# Altium PCB kijek_d.PcbDoc
Units mm, origin at the board's own origin, x right, y up, seen from the top; angles counter-clockwise.
Board outline 45 x 20 mm, 2 copper layers (Top Layer, Bottom Layer); 14 components, 17 nets, 75 pads, 2 vias.
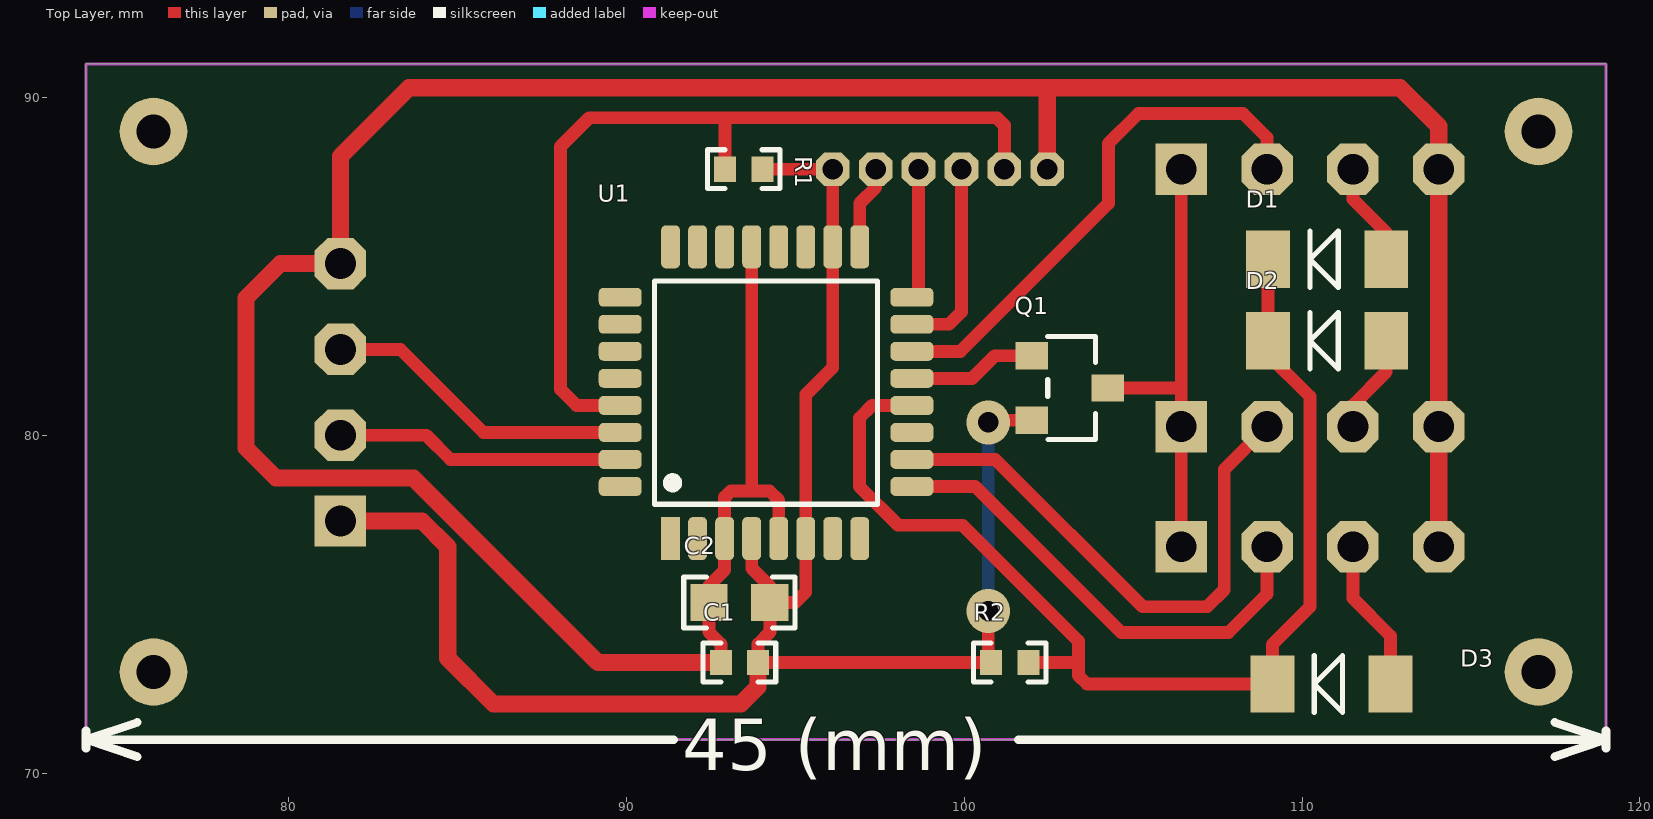
[diagram p0: Top Layer view]
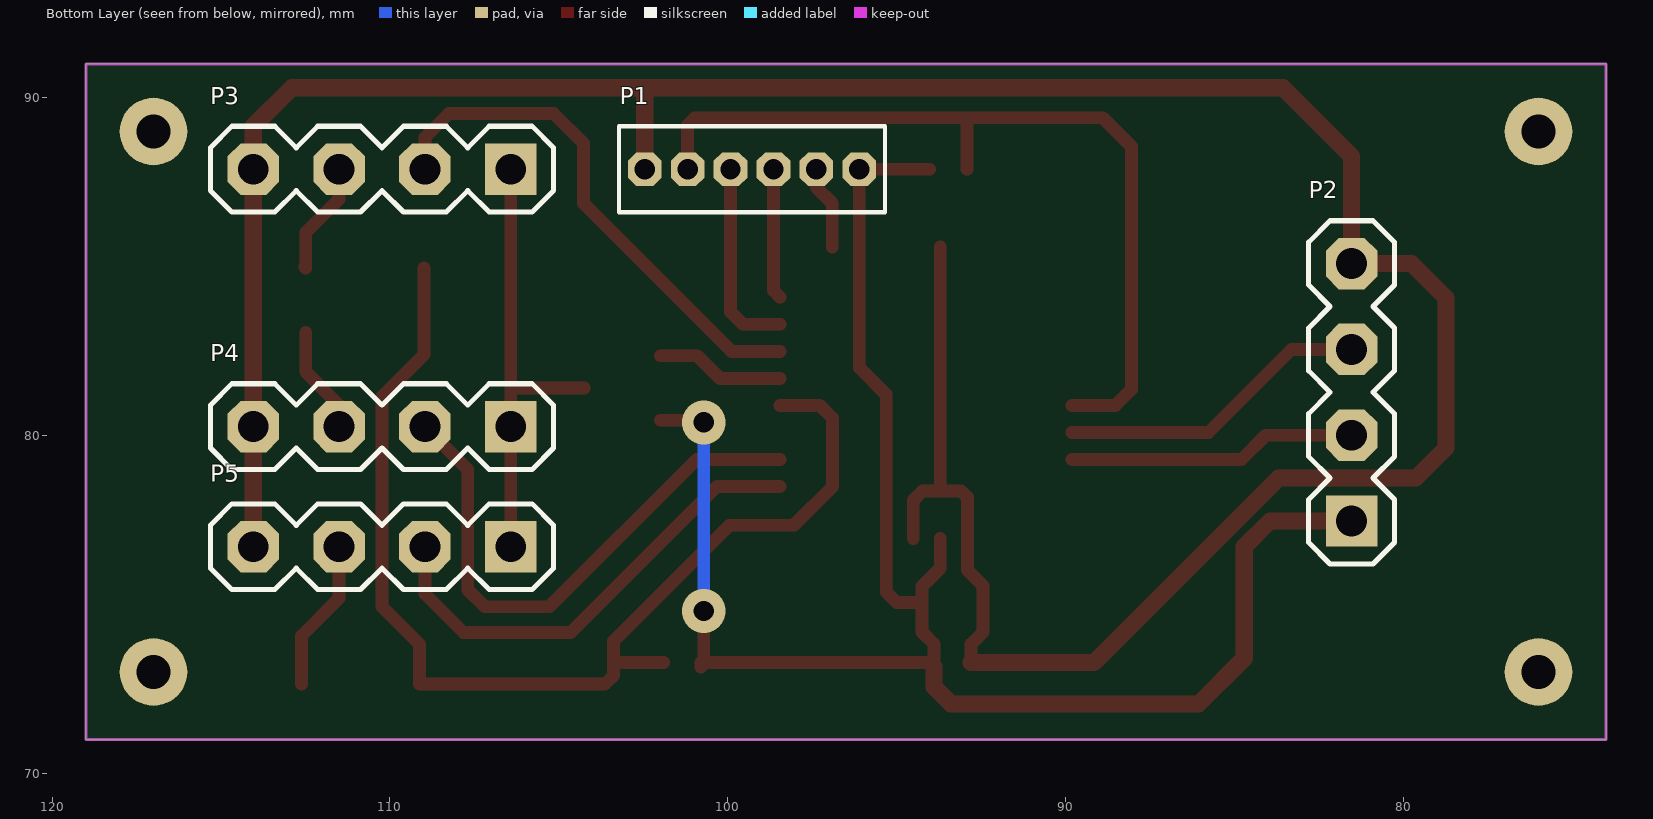
[diagram p1: Bottom Layer view, seen from below]

## Layer stack, top to bottom
Top Layer: signal copper 0.0356
Dielectric: dielectric 0.32, FR-4, Dk 4.8
Bottom Layer: signal copper 0.0356

## Board outline
74,71 119,71 119,91 74,91

## Design rules (kind name [scope] priority, off if disabled: settings)
Clearance [All] p1: gap=0.203
PlaneConnect [All] p1: planeconnectstyle=Relief reliefexpansion=0.508 reliefentries=4 reliefconductorwidth=0.381 reliefairgap=0.254
PolygonConnect [All] p1: connectstyle=Relief reliefconductorwidth=0.381 reliefentries=4 polygonreliefangle="90 Angle" airgapwidth=0.254
RoutingVias [All] p1: holewidth=0.711 width=1.27 viastyle="Through Hole" minholewidth=0.4 minwidth=1 maxholewidth=0.711 maxwidth=1.27
SolderMaskExpansion [All] p1: expansion=0.102
Width [All] p1: maxlimit=0.508 minlimit=0.254 preferedwidth=0.381
27 further rules are at their usual default settings.

## Components (designator, comment, footprint, x,y, rotation, side; value= is the part's Value field where it differs from the comment)
C1 "100nF/16V" C0402 93.345,73.279 r180 top
C2 "10uF/6,3V" C0603 93.345,75.057 r180 top
D1 "1N4148" DO-213A 110.744,85.217 r0 top
D2 "1N4148" DO-213A 110.744,82.804 r0 top
D3 "1N4148" DO-213A 110.871,72.644 r0 top
P1 "PROGRAM" SMA06-1 96.108,87.884 r180 bottom
P2 "RS232+PWR" MA04-1 81.534,81.28 r90 bottom
P3 "CZ_LEWO" MA04-1 110.236,87.884 r0 bottom
P4 "CZ_PROSTO" MA04-1 110.236,80.264 r0 bottom
P5 "CZ_PRAWO" MA04-1 110.236,76.708 r0 bottom
Q1 "AO3401" SOT23 103.124,81.407 r270 top
R1 "10K" R0402 93.472,87.884 r180 top
R2 "10K" R0402 101.346,73.279 r180 top
U1 "ATmega8-AU/MU" TQFP-32A 94.133,81.268 r90 top

## Footprints (in the part's own frame and the unit in brackets; to place one, negate y for a bottom-side part, rotate by r counter-clockwise, add the part's x,y. Pads: shape width x height; smd on the part's side, far side on the other; paste and mask are expansions set on the pad)
C0402 [mm] "Chip Resistor, Body 1.0x0.5mm, IPC Low Density"
  rect 0.65x0.75 smd: 1(-0.55,0) 2(0.55,0)
  silkscreen extent -1.07,-0.58 1.07,0.58, body extent -0.52,-0.28 0.53,0.28, height 0.4
C0603 [mm] "Chip Resistor, Body 1.6x0.8mm, IPC Low Density"
  rect 1.1x1.1 smd: 1(-0.9,0) 2(0.9,0)
  silkscreen extent -1.65,-0.75 1.65,0.75, body extent -0.85,-0.47 0.85,0.47, height 0.6
DO-213A [mm]
  rect 1.3x1.7 smd: 1(-1.75,0) 2(1.75,0)
  silkscreen extent -0.51,-0.84 0.33,0.84, body extent -1.75,-0.7 1.75,0.7, height 1.39
MA04-1 [mil]
  rect 60x60 hole 35.98: 1(-150,0)
  oct 60x60 hole 35.98: 2(-50,0) 3(50,0) 4(150,0)
  silkscreen extent -200,-50 200,50, body extent -200,-50 200,50, height 339
R0402 [mm] "Chip Resistor, Body 1.0x0.5mm, IPC Low Density"
  rect 0.65x0.75 smd: 1(-0.55,0) 2(0.55,0)
  silkscreen extent -1.07,-0.58 1.07,0.58, body extent -0.52,-0.28 0.53,0.28, height 0.4
SMA06-1 [mm]
  oct 1x1 hole 0.6: 1(-6.35,0) 2(-5.08,0) 3(-3.81,0) 4(-2.54,0) 5(-1.27,0) 6(0,0)
  silkscreen extent -7.11,-1.27 0.76,1.27, body extent -6.98,-1.2 0.64,1.2, height 5
SOT23 [mil]
  rect 32x38 smd: 1(-37.6,-44.33) 2(37.6,-44.33) 3(0,44.33)
  silkscreen extent -60,-26 60,30, body extent -57,-49 57,48, height 40
TQFP-32A [mil]
  rect 50x22 smd: 1(-170,111.22)
  rrect50% 50x22 smd: 2(-170,79.72) 3(-170,48.23) 4(-170,16.73) 5(-170,-14.76) 6(-170,-46.26) 7(-170,-77.76) 8(-170,-109.25) 17(170,-109.25) 18(170,-77.76) 19(170,-46.26) 20(170,-14.76) 21(170,16.73) 22(170,48.23) 23(170,79.72) 24(170,111.22)
  rrect50% 22x50 smd: 9(-109.25,-170) 10(-77.76,-170) 11(-46.26,-170) 12(-14.76,-170) 13(16.73,-170) 14(48.23,-170) 15(79.72,-170) 16(111.22,-170) 25(111.22,170) 26(79.72,170) 27(48.23,170) 28(16.73,170) 29(-14.76,170) 30(-46.26,170) 31(-77.76,170) 32(-109.25,170)
  silkscreen extent -130,-130 130,130, body extent -180,-180 182,182, height 47

## Part data
C1 C2: library part Cap, "Capacitor"
D1 D2 D3: library part Diode
P1: library part "Header 6", "Header, 6-Pin"
P2 P3 P4 P5: library part "Header 4", "Header, 4-Pin"
R1 R2: library part Res, "Resistor"
U1: "TQFP - 32pin / MLF - 32pin"

## Free pads (board coordinates)
  round 2 hole 1: GND(76,73) GND(76,89) GND(117,73) GND(117,89)

## Via types
v1: diameter 1.3, hole 0.6, Top Layer to Bottom Layer, 2 vias

## Nets (pads, with @x,y where several pads share a name; then routed paths per layer and width w, separated by ;. In a path a pad name is that pad's centre, name@x,y a point inside that pad or via, vN(x,y) a via of type N, cw(c..) or ccw(c..) an arc to the next point about the centre after c; other vN are vias at no path point)
GND: C1.2 C2.2 P1.1 P2.4 P3.4 P4.4 P5.4 U1.3 U1.5 U1.21 | length 91.4
  Top Layer w0.381: C1.2 92.795,73.829 92.445,74.179 C2.2 92.445,75.554 92.908,76.017 U1.3 92.908,78.176 93.091,78.359 93.599,78.359 ; U1.21 93.708,78.468 93.599,78.359 ; U1.5 94.508,78.085 94.234,78.359 93.599,78.359
  Top Layer w0.508: C1.2 89.154,73.279 83.693,78.74 79.629,78.74 78.74,79.629 78.74,84.074 79.756,85.09 P2.4 81.534,88.265 83.566,90.297 102.489,90.297 ; P1.1 102.458,90.266 102.489,90.297 ; P5.4@114.046,76.962 P4.4 P3.4 114.046,89.154 112.903,90.297 102.489,90.297
NetD1_1: D1.1 D2.1 D3.1 R2.1 U1.12 | length 33.7
  Top Layer w0.381: U1.12 97.276,80.893 96.901,80.518 96.901,78.486 98.044,77.343 99.949,77.343 103.378,73.914 103.378,73.279 ; R2.1 103.378,73.279 ; D1.1@108.994,84.963 108.994,82.395 110.236,81.153 110.236,74.93 109.121,73.815 D3.1 103.632,72.644 103.378,72.898 103.378,73.279
NetD1_2: D1.2 P3.3 | length 3.4
  Top Layer w0.381: P3.3 111.506,86.995 112.494,86.007 D1.2 112.494,84.963 D1.2@112.522,84.991
NetD2_2: D2.2 P4.3 | length 3.2
  Top Layer w0.381: P4.3 111.506,80.899 112.494,81.887 D2.2 D2.2@112.494,83.058
NetD3_2: D3.2 P5.3 | length 4.5
  Top Layer w0.381: P5.3 111.506,75.184 112.621,74.069 D3.2
NetP1_2: P1.2 R1.2 U1.29 | length 25.6
  Top Layer w0.381: U1.29 88.525,80.893 88.053,81.365 88.053,88.561 88.9,89.408 92.922,89.408 ; R1.2 92.922,89.408 ; P1.2 101.188,89.185 100.965,89.408 92.922,89.408
NetP1_3: P1.3 U1.15 | length 5.8
  Top Layer w0.381: U1.15 99.549,83.293 99.918,83.662 P1.3
NetP1_4: P1.4 U1.16 | length 3.9
  Top Layer w0.381: U1.16 98.648,84.29 P1.4
NetP1_5: P1.5 U1.17 | length 2.5
  Top Layer w0.381: U1.17 96.908,86.875 97.378,87.345 P1.5
NetP2_2: P2.2 U1.31 | length 8.6
  Top Layer w0.381: P2.2 84.074,80.01 84.791,79.293 U1.31
NetP2_3: P2.3 U1.30 | length 9.3
  Top Layer w0.381: P2.3 83.312,82.55 85.769,80.093 U1.30
NetP3_1: P3.1 P4.1 P5.1 Q1.3 | length 12.7
  Top Layer w0.381: Q1.3 106.426,81.407 ; P5.1@106.426,76.962 P3.1@106.426,87.503
NetP3_2: P3.2 U1.14 | length 16.1
  Top Layer w0.381: U1.14 99.892,82.493 104.267,86.868 104.267,88.646 105.156,89.535 108.255,89.535 108.966,88.824 P3.2@108.966,87.503
NetP4_2: P4.2 U1.10 | length 16.6
  Top Layer w0.381: U1.10 100.92,79.293 105.283,74.93 107.188,74.93 107.696,75.438 107.696,78.994 P4.2
NetP5_2: P5.2 U1.9 | length 14.4
  Top Layer w0.381: U1.9 100.323,78.493 104.648,74.168 107.823,74.168 108.966,75.311 P5.2@108.966,76.962
NetQ1_1: Q1.1 U1.13 | length 3.8
  Top Layer w0.381: U1.13 100.235,81.693 100.904,82.362 Q1.1
VCC: C1.1 C2.1 P1.6 P2.1 Q1.2 R1.1 R2.2 U1.4 U1.6 U1.18 | length 53.4
  Top Layer w0.381: U1.4 93.708,76.073 94.245,75.536 C2.1 ; R1.1 P1.6 U1.18 96.108,82.011 95.308,81.211 U1.6 95.308,75.369 94.996,75.057 C2.1 ; v1(100.711,74.803) 100.711,73.364 R2.2 ; v1(100.711,80.391) 100.772,80.452 Q1.2 ; R2.2@100.796,73.152 100.669,73.279 C1.1 93.895,73.829 94.245,74.179 C2.1
  Top Layer w0.508: P2.1 83.947,77.47 84.709,76.708 84.709,73.406 86.064,72.051 93.387,72.051 93.895,72.559 C1.1@93.895,73.152
  Bottom Layer w0.381: v1(100.711,74.803) 100.711,74.549 v1(100.711,80.391)
pads on no net: U1.1 U1.2 U1.7 U1.8 U1.11 U1.19 U1.20 U1.22 U1.23 U1.24 U1.25 U1.26 U1.27 U1.28 U1.32

## Keep-outs
Keep-Out Layer:
  the board outline again, w0.1

## Silkscreen, mask and mechanical layers (free items; w line width, h text height)
Top Overlay:
  lines w0.254: 74,70.746 74,71.254 ; 75.524,70.492 74,71 ; 75.524,71.508 74,71 ; 91.396,71 74,71 ; 101.604,71 119,71 ; 117.476,70.492 119,71 ; 117.476,71.508 119,71 ; 119,70.746 119,71.254
  text "45 (mm)" at 91.65,70.086 h1.52